# Altium PCB 2017核心板v3.0.PcbDoc (part 1 of 2)
Units mil, origin at the board's own origin, x right, y up, seen from the top; angles counter-clockwise.
Board outline 2660.2 x 2023.11 mil, 2 copper layers (Top Layer, Bottom Layer); 56 components, 128 nets, 399 pads, 43 vias.
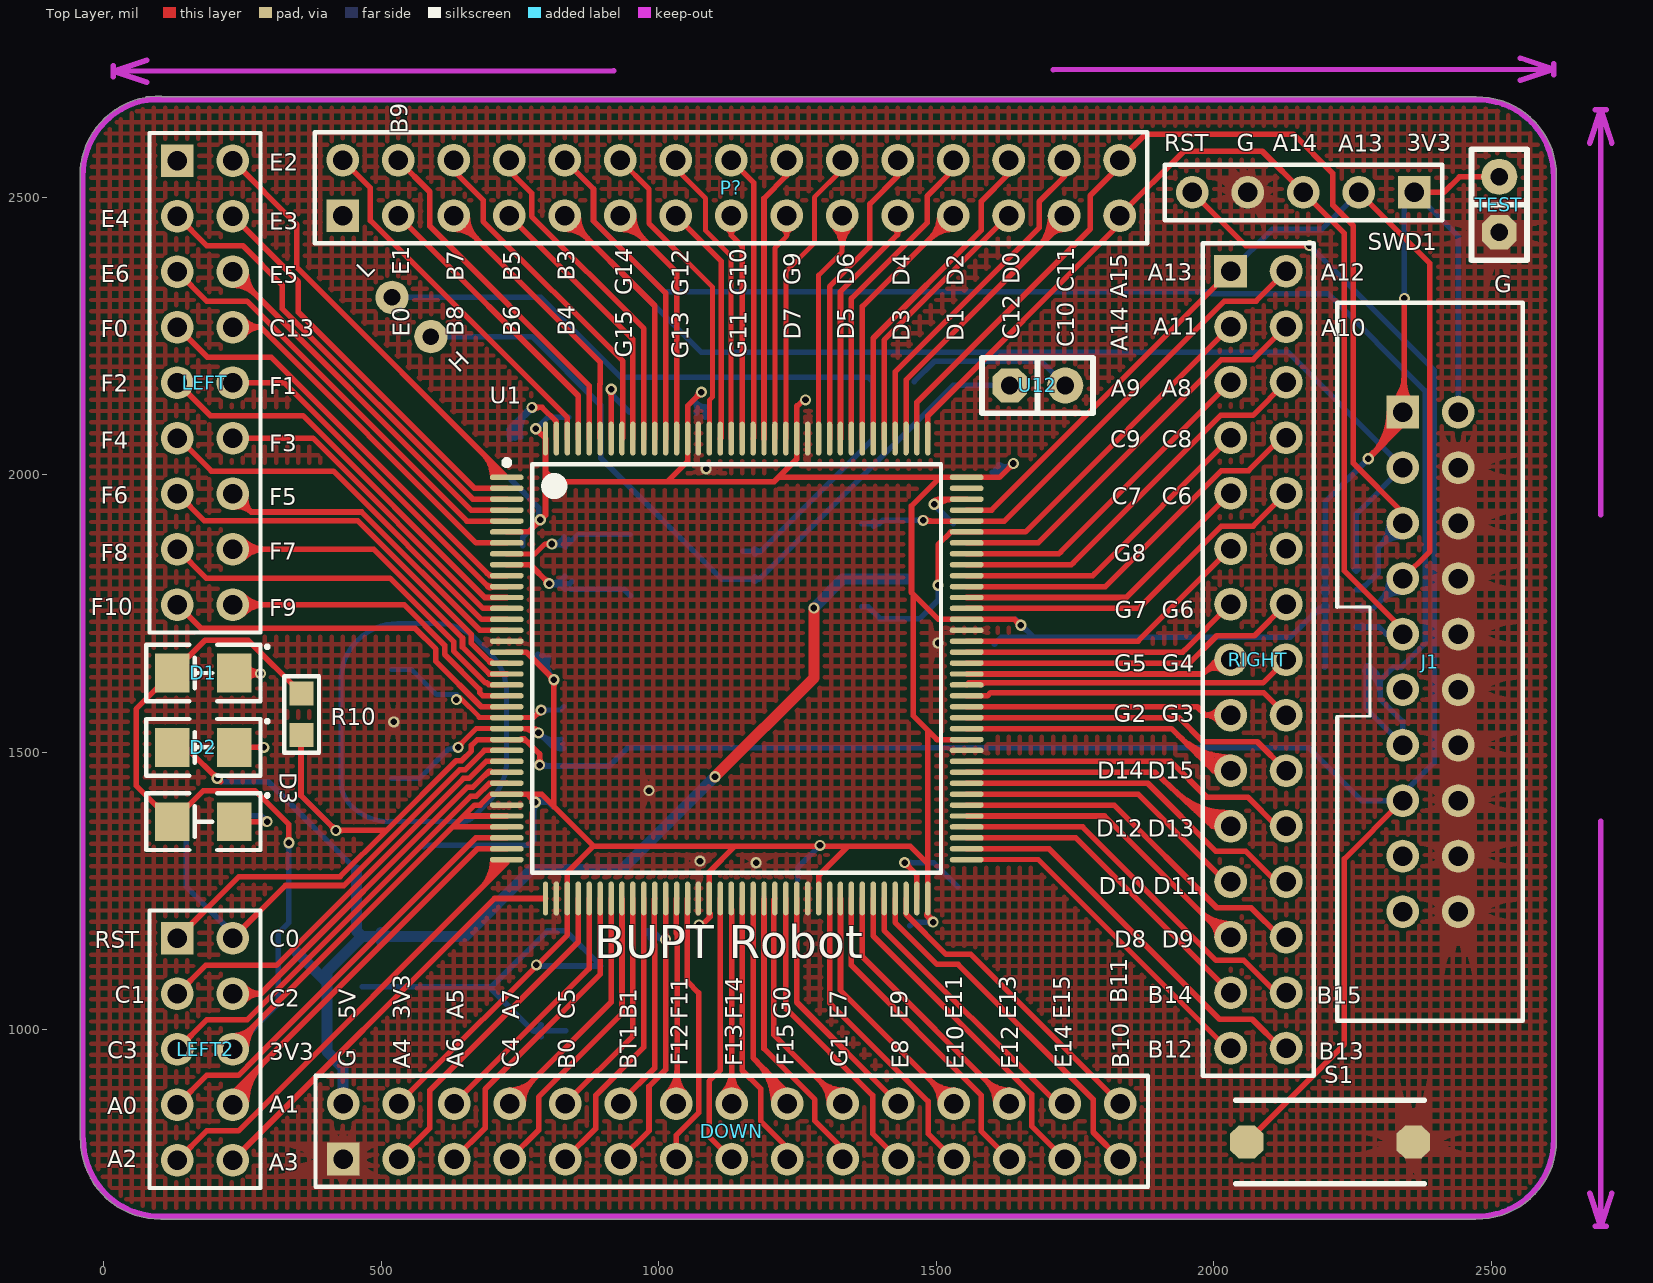
[diagram p0: Top Layer view]
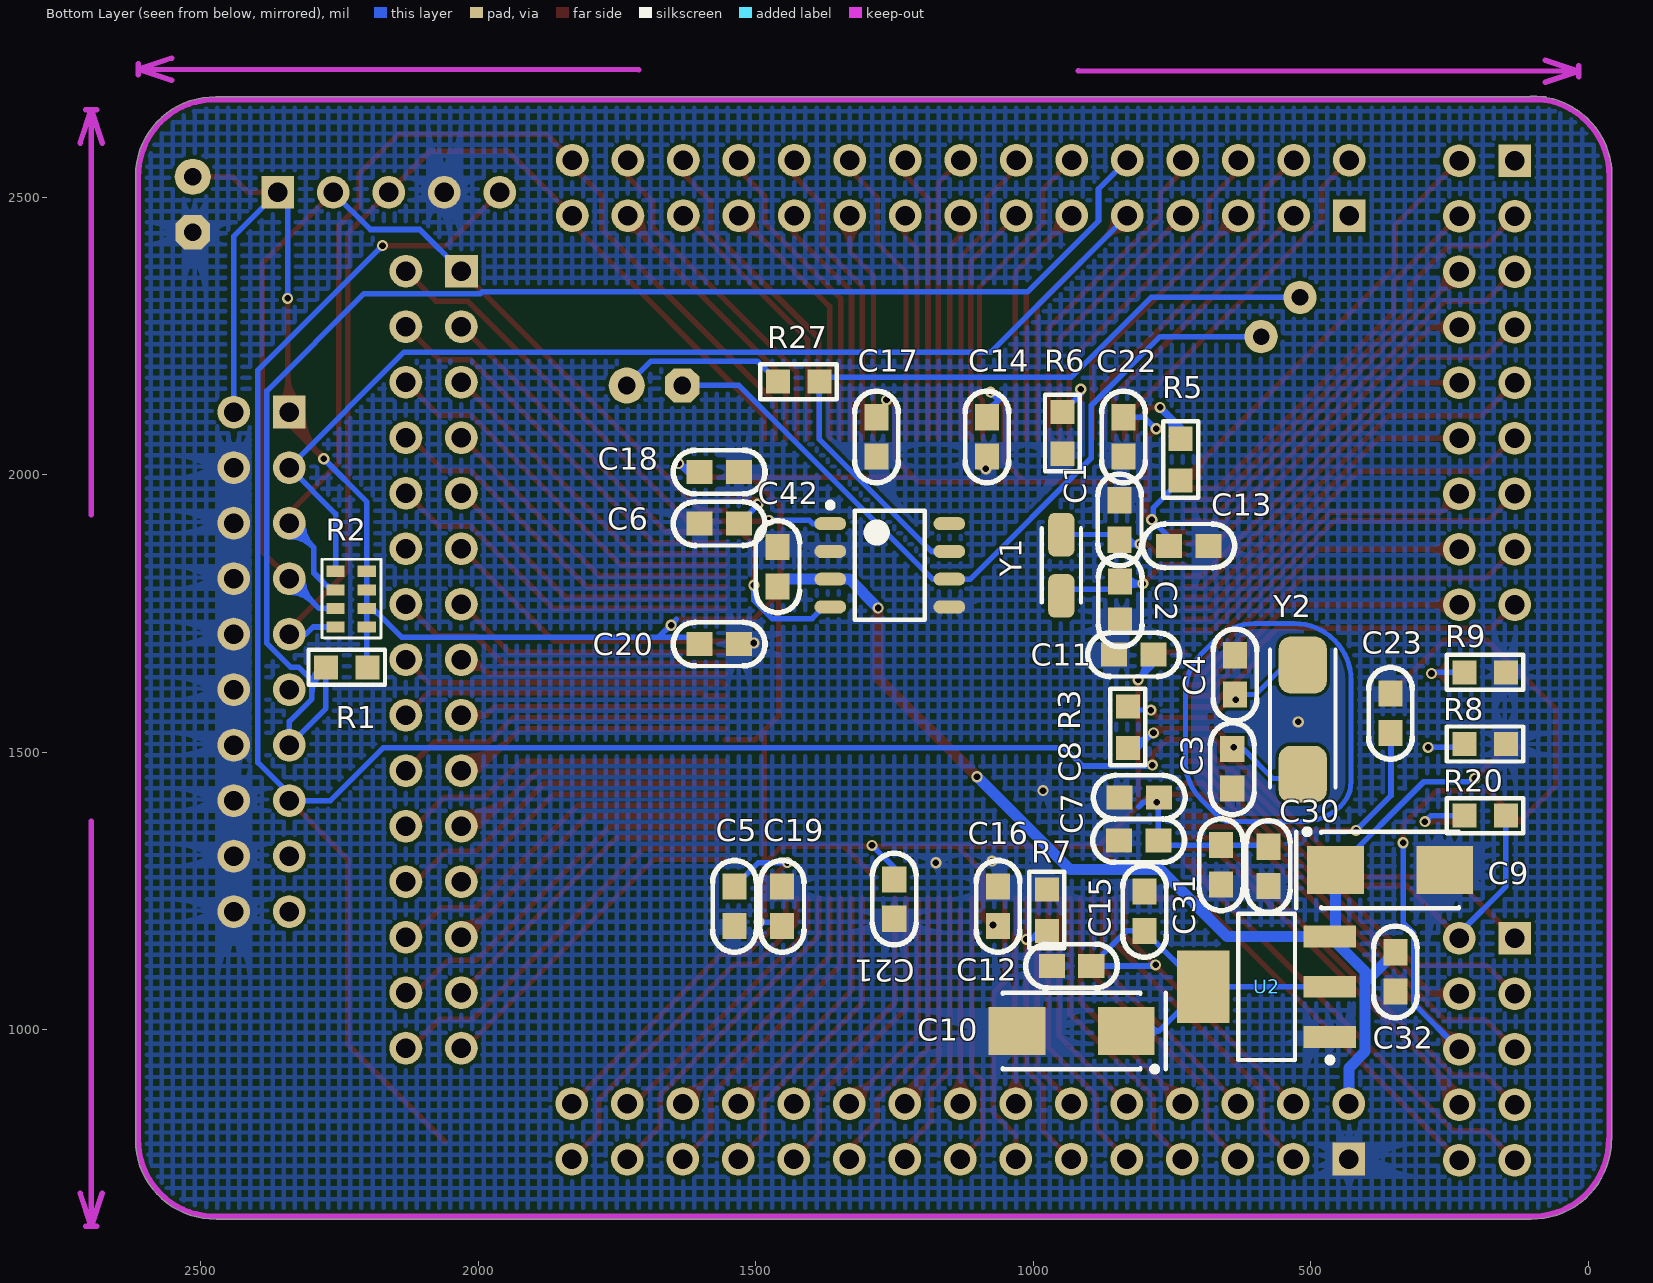
[diagram p1: Bottom Layer view, seen from below]

## Layer stack, top to bottom
Top Layer: signal copper 1.4
Dielectric: dielectric 12.6, FR-4, Dk 4.8
Bottom Layer: signal copper 1.4

## Board outline
-43.01,804 -43.01,2536.6 cw(c-38.08,2537.5) -43.1,2537.43 cw(c99.61,2539.32) 74.8,2679.86 cw(c78,2676) 78,2681.02 82.57,2681.02 cw(c99.61,2539.32) 102.09,2682.01 cw(c102,2677) 105.01,2681.02 2471.6,2681.02 cw(c2472.5,2676.08) 2472.43,2681.1 cw(c2474.32,2538.39) 2617.04,2538.39 cw(c2474.32,2538.39) 2617.02,2535.96 cw(c2474.32,2538.39) 2617.01,2535.91 2617.02,2536 2617.02,804.4 cw(c2612.08,803.5) 2617.1,803.57 cw(c2474.39,801.68) 2617.11,801.68 cw(c2474.39,801.68) 2471.96,658.99 cw(c2474.39,801.68) 2471.91,658.99 2471.96,658.99 103.4,658.99 cw(c102.5,663.92) 102.57,658.9 cw(c100.68,801.61) -42.03,801.02 cw(c-38,804)

## Design rules (kind name [scope] priority, off if disabled: settings)
Clearance [All] p1: gap=5.98
ComponentClearance [All] p1: gap=0.04 collisioncheckmode=3 verticalgap=10 showdistances=FALSE
PolygonConnect [All] p1: connectstyle=Direct reliefconductorwidth=10 reliefentries=4 polygonreliefangle="90 Angle" airgapwidth=10
RoutingVias RoutingVias_1 [All] p1: holewidth=28 width=50 viastyle="Through Hole" minholewidth=10 minwidth=10 maxholewidth=28 maxwidth=50
RoutingVias [All] p2: holewidth=12 width=12 viastyle="Through Hole" minholewidth=10 minwidth=10 maxholewidth=28 maxwidth=50
SolderMaskExpansion [All] p1: expansion=4
Width [All] p1: maxlimit=100 minlimit=7 preferedwidth=10
27 further rules are at their usual default settings.

## Components (designator, comment, footprint, x,y, rotation, side; value= is the part's Value field where it differs from the comment)
C1 "CAP" CAP-MLCC-0603#1 844,1954 r270 bottom
C2 "CAP" CAP-MLCC-0603#1 843,1737 r90 bottom
C3 "CAP" CAP-MLCC-0603#1 641,1435 r90 bottom
C4 "CAP" CAP-MLCC-0603#1 636,1675 r270 bottom
C5 "225" CAP-MLCC-0603#1 1538,1258 r270 bottom
C6 "225" CAP-MLCC-0603#1 1530,1912 r0 bottom
C7 "1uF" CAP-MLCC-0603#1 845,1341 r180 bottom
C8 "0.1uF" CAP-MLCC-0603#1 844,1419 r180 bottom
C9 "CAP-TAN" CAP-TAN-6032/CAPC 455,1288 r0 bottom
C10 "CAP-TAN" CAP-TAN-6032/CAPC 832,998 r180 bottom
C11 "CAP" CAP-MLCC-0603#1 854,1676 r180 bottom
C12 "CAP" CAP-MLCC-0603#1 966,1115 r180 bottom
C13 "CAP" CAP-MLCC-0603#1 684,1872 r0 bottom
C14 "CAP" CAP-MLCC-0603#1 1083,2033 r90 bottom
C15 "CAP" CAP-MLCC-0603#1 799,1249 r270 bottom
C16 "CAP" CAP-MLCC-0603#1 1063,1258 r270 bottom
C17 "CAP" CAP-MLCC-0603#1 1282,2033 r90 bottom
C18 "CAP" CAP-MLCC-0603#1 1530,2005 r0 bottom
C19 "CAP" CAP-MLCC-0603#1 1452,1258 r270 bottom
C20 "CAP" CAP-MLCC-0603#1 1530,1695 r0 bottom
C21 "CAP" CAP-MLCC-0603#1 1250,1200 r90 bottom
C22 "CAP" CAP-MLCC-0603#1 837,2033 r90 bottom
C23 "0.1u" CAP-MLCC-0603#1 356,1605.8 r270 bottom
C30 "1uF" CAP-MLCC-0603#2 576,1259 r270 bottom
C31 "10nF" CAP-MLCC-0603#2 661,1262 r270 bottom
C32 "CAP" CAP-MLCC-0603#2 347,1069 r270 bottom
C42 "0.1μF" CAP-MLCC-0603#2 1460,1799 r270 bottom
D1 "LED" LED-1206 179,1643 r180 top
D2 "LED" LED-1206 179,1509 r180 top
D3 "LED" LED-1206 179,1375 r180 top
DOWN "Header 15X2" HDR2X15 431,767 r0 top
J1 "JTAG" FC_2x10 2340,2113 r0 top
LEFT "Header 9X2" HDR2X9 132,2566 r270 top
LEFT2 "Header 5X2" HDR2X5 132,1165 r270 top
P? "Header 15X2" HDR2X15 430,2467 r0 top
R1 "10K" Res-0603 2274,1653 r180 bottom
R2 "10K" RES-ARR4 2229,1776 r90 bottom
R3 "1MΩ" RES-0603#1 829,1508 r90 bottom
R5 "0Ω" RES-0603#1 734,2065 r270 bottom
R6 "RES" RES-0603#1 947,2038 r90 bottom
R7 "RES" RES-0603#1 975,1253 r270 bottom
R8 "RES" RES-0603#1 222.8,1515 r180 bottom
R9 "RES" RES-0603#1 148,1644 r0 bottom
R10 "RES" RES-0603#1 356,1531 r90 top
R20 "RES" RES-0603#2 148,1386 r180 bottom
R27 "120Ω" RES-0603#2 1385,2168 r180 bottom
RIGHT "Header 15X2" HDR2X15 2030,2367 r270 top
S1 "SW-PB" KEY 2209,798 r0 top
SWD1 "Header 5" HDR1X5 2361,2509 r180 top
TEST "Header 2" SIP2 2514,2537 r270 top
U1 "STM32F407ZGET6" LQFP144-L 1140,1651 r0 top
U2 "IC-AS1117-3.3V" SOT-223 465,987 r90 bottom
U12 "Header 2" SIP2 1732,2161 r180 top
Y1 "32.768kHz" Osc-3216 949,1837 r90 bottom
Y2 "8MHz" Osc-6032 514,1559 r270 bottom
? "TJA1050" TJA1050 1258,1837 r180 bottom

## Footprints (in the part's own frame and the unit in brackets; to place one, negate y for a bottom-side part, rotate by r counter-clockwise, add the part's x,y. Pads: shape width x height; smd on the part's side, far side on the other; paste and mask are expansions set on the pad)
CAP-MLCC-0603#1 [mm]
  rect 1.2x1.1 smd: 1(0,0) 2(1.8,0)
  silkscreen extent -1.2,-1 3,1, body extent 0.02,-0.48 1.77,0.47, height 0.85
CAP-MLCC-0603#2 [mm]
  rect 1.2x1.1 smd: 1(0,0) 2(-1.8,0)
  silkscreen extent -3,-1 1.2,1, body extent -1.77,-0.47 -0.02,0.48, height 0.85
CAP-TAN-6032/CAPC [mm]
  rect 2.6x2.2 smd: 1(0,0) 2(-5,0)
  silkscreen extent -5.65,-1.87 1.8,1.75
FC_2x10 [mm] "Connector; Header; 6x2 Position"
  rect 1.5x1.5 hole 0.9: 1(0,0)
  round 1.5 hole 0.9: 2(2.54,0) 3(0,-2.54) 4(2.54,-2.54) 5(0,-5.08) 6(2.54,-5.08) 7(0,-7.62) 8(2.54,-7.62) 9(0,-10.16) 10(2.54,-10.16) 11(0,-12.7) 12(2.54,-12.7) 13(0,-15.24) 14(2.54,-15.24) 15(0,-17.78) 16(2.54,-17.78) 17(0,-20.32) 18(2.54,-20.32) 19(0,-22.86) 20(2.54,-22.86)
  silkscreen extent -3,-27.86 5.5,5
HDR1X5 [mm] "Connector; Header; 5 Position"
  rect 1.5x1.5 hole 0.9: 1(0,0)
  round 1.5 hole 0.9: 2(2.54,0) 3(5.08,0) 4(7.62,0) 5(10.16,0)
  silkscreen extent -1.27,-1.27 11.43,1.27
HDR2X5 [mm] "Connector; Header; 5x2 Position"
  rect 1.5x1.5 hole 0.9: 1(0,0)
  round 1.5 hole 0.9: 2(0,2.54) 3(2.54,0) 4(2.54,2.54) 5(5.08,0) 6(5.08,2.54) 7(7.62,0) 8(7.62,2.54) 9(10.16,0) 10(10.16,2.54)
  silkscreen extent -1.27,-1.27 11.43,3.81
HDR2X9 [mm] "Connector; Header; 9x2 Position"
  rect 1.5x1.5 hole 0.9: 1(0,0)
  round 1.5 hole 0.9: 2(0,2.54) 3(2.54,0) 4(2.54,2.54) 5(5.08,0) 6(5.08,2.54) 7(7.62,0) 8(7.62,2.54) 9(10.16,0) 10(10.16,2.54) 11(12.7,0) 12(12.7,2.54) 13(15.24,0) 14(15.24,2.54) 15(17.78,0) 16(17.78,2.54) 17(20.32,0) 18(20.32,2.54)
  silkscreen extent -1.27,-1.27 21.59,3.81
HDR2X15 [mm] "Connector; Header; 15x2 Position"
  rect 1.5x1.5 hole 0.9: 1(0,0)
  round 1.5 hole 0.9: 2(0,2.54) 3(2.54,0) 4(2.54,2.54) 5(5.08,0) 6(5.08,2.54) 7(7.62,0) 8(7.62,2.54) 9(10.16,0) 10(10.16,2.54) 11(12.7,0) 12(12.7,2.54) 13(15.24,0) 14(15.24,2.54) 15(17.78,0) 16(17.78,2.54) 17(20.32,0) 18(20.32,2.54) 19(22.86,0) 20(22.86,2.54) 21(25.4,0) 22(25.4,2.54) 23(27.94,0) 24(27.94,2.54) 25(30.48,0) 26(30.48,2.54) 27(33.02,0) 28(33.02,2.54) 29(35.56,0) 30(35.56,2.54)
  silkscreen extent -1.27,-1.27 36.83,3.81
KEY [mil]
  oct 60x60 smd: 1(-150,0) 2(150,0)
  silkscreen extent -170,-75 170,75
LED-1206 [mil]
  rect 62x70 smd: 1(56,0) 2(-56,0)
  silkscreen extent -116,-51 103,51
LQFP144-L [mm]
  oval 1.55x0.25 smd: 1(-10.525,8.75) 2(-10.525,8.25) 3(-10.525,7.75) 4(-10.525,7.25) 5(-10.525,6.75) 6(-10.525,6.25) 7(-10.525,5.75) 8(-10.525,5.25) 9(-10.525,4.75) 10(-10.525,4.25) 11(-10.525,3.75) 12(-10.525,3.25) 13(-10.525,2.75) 14(-10.525,2.25) 15(-10.525,1.75) 16(-10.525,1.25) 17(-10.525,0.75) 18(-10.525,0.25) 19(-10.525,-0.25) 20(-10.525,-0.75) 21(-10.525,-1.25) 22(-10.525,-1.75) 23(-10.525,-2.25) 24(-10.525,-2.75) 25(-10.525,-3.25) 26(-10.525,-3.75) 27(-10.525,-4.25) 28(-10.525,-4.75) 29(-10.525,-5.25) 30(-10.525,-5.75) 31(-10.525,-6.25) 32(-10.525,-6.75) 33(-10.525,-7.25) 34(-10.525,-7.75) 35(-10.525,-8.25) 36(-10.525,-8.75) 73(10.525,-8.75) 74(10.525,-8.25) 75(10.525,-7.75) 76(10.525,-7.25) 77(10.525,-6.75) 78(10.525,-6.25) 79(10.525,-5.75) 80(10.525,-5.25) 81(10.525,-4.75) 82(10.525,-4.25) 83(10.525,-3.75) 84(10.525,-3.25) 85(10.525,-2.75) 86(10.525,-2.25) 87(10.525,-1.75) 88(10.525,-1.25) 89(10.525,-0.75) 90(10.525,-0.25) 91(10.525,0.25) 92(10.525,0.75) 93(10.525,1.25) 94(10.525,1.75) 95(10.525,2.25) 96(10.525,2.75) 97(10.525,3.25) 98(10.525,3.75) 99(10.525,4.25) 100(10.525,4.75) 101(10.525,5.25) 102(10.525,5.75) 103(10.525,6.25) 104(10.525,6.75) 105(10.525,7.25) 106(10.525,7.75) 107(10.525,8.25) 108(10.525,8.75)
  oval 0.25x1.55 smd: 37(-8.75,-10.525) 38(-8.25,-10.525) 39(-7.75,-10.525) 40(-7.25,-10.525) 41(-6.75,-10.525) 42(-6.25,-10.525) 43(-5.75,-10.525) 44(-5.25,-10.525) 45(-4.75,-10.525) 46(-4.25,-10.525) 47(-3.75,-10.525) 48(-3.25,-10.525) 49(-2.75,-10.525) 50(-2.25,-10.525) 51(-1.75,-10.525) 52(-1.25,-10.525) 53(-0.75,-10.525) 54(-0.25,-10.525) 55(0.25,-10.525) 56(0.75,-10.525) 57(1.25,-10.525) 58(1.75,-10.525) 59(2.25,-10.525) 60(2.75,-10.525) 61(3.25,-10.525) 62(3.75,-10.525) 63(4.25,-10.525) 64(4.75,-10.525) 65(5.25,-10.525) 66(5.75,-10.525) 67(6.25,-10.525) 68(6.75,-10.525) 69(7.25,-10.525) 70(7.75,-10.525) 71(8.25,-10.525) 72(8.75,-10.525) 109(8.75,10.525) 110(8.25,10.525) 111(7.75,10.525) 112(7.25,10.525) 113(6.75,10.525) 114(6.25,10.525) 115(5.75,10.525) 116(5.25,10.525) 117(4.75,10.525) 118(4.25,10.525) 119(3.75,10.525) 120(3.25,10.525) 121(2.75,10.525) 122(2.25,10.525) 123(1.75,10.525) 124(1.25,10.525) 125(0.75,10.525) 126(0.25,10.525) 127(-0.25,10.525) 128(-0.75,10.525) 129(-1.25,10.525) 130(-1.75,10.525) 131(-2.25,10.525) 132(-2.75,10.525) 133(-3.25,10.525) 134(-3.75,10.525) 135(-4.25,10.525) 136(-4.75,10.525) 137(-5.25,10.525) 138(-5.75,10.525) 139(-6.25,10.525) 140(-6.75,10.525) 141(-7.25,10.525) 142(-7.75,10.525) 143(-8.25,10.525) 144(-8.75,10.525)
  silkscreen extent -10.65,-9.35 9.35,9.55
Osc-3216 [mm]
  rrect50% 2x1.2 smd: 1(-1.4,0) 2(1.4,0)
  silkscreen extent -1.7,-0.9 1.7,0.9
Osc-6032 [mm]
  rrect50% 2.6x2.2 smd: 1(-2.5,0) 2(2.5,0)
  silkscreen extent -3.2,-1.5 3.1,1.5
Res-0603 [mm]
  rect 1.1x1.1 smd: 1(0,0) 2(1.9,0)
  silkscreen extent -0.8,-0.8 2.7,0.8, body extent 0.1,-0.48 1.8,0.47, height 0.6
RES-0603#1 [mm]
  rect 1.1x1.1 smd: 1(0,0) 2(1.9,0)
  silkscreen extent -0.8,-0.8 2.7,0.8, body extent 0.1,-0.48 1.8,0.47, height 0.6
RES-0603#2 [mm]
  rect 1.1x1.1 smd: 1(0,0) 2(-1.9,0)
  silkscreen extent -2.7,-0.8 0.8,0.8, body extent -1.8,-0.47 -0.1,0.48, height 0.6
RES-ARR4 [mm]
  rect 0.508x0.835 smd: 1(-1.275,0.701) 2(-1.275,-0.727) 3(-0.425,0.701) 4(-0.425,-0.727) 5(0.425,0.701) 6(0.425,-0.727) 7(1.275,0.701) 8(1.275,-0.727)
  silkscreen extent -1.77,-1.37 1.83,1.32
SIP2 [mil]
  round 65 hole 32: 1(0,0)
  oct 62x62 hole 32: 2(100,0)
  silkscreen extent -50,-50 150,50
SOT-223 [mm] "SOT223, 4-Leads, Body 6.7x7.3mm (max), Pitch 2.30mm, IPC Medium Density"
  rect 1x2.4 smd: 1(0,0) 2(2.3,0) 3(4.6,0)
  rect 3.3x2.4 smd: 2(2.3,5.8)
  silkscreen extent -1.17,-0.12 5.65,4.2
TJA1050 [mm] "SOIC, 8-Leads, Body 4.90x3.90mm, Pitch 1.27mm, IPC Medium Density"
  oval 1.45x0.6 smd: 1(-2.725,1.905) 2(-2.725,0.635) 3(-2.725,-0.635) 4(-2.725,-1.905) 5(2.725,-1.905) 6(2.725,-0.635) 7(2.725,0.635) 8(2.725,1.905)
  silkscreen extent -2.85,-2.5 1.6,2.88, body extent -2,-2.5 2,2.5, height 1.75

## Part data
C1 C2 C3 C4 C11 C12 C13 C14 C15 C16 C17 C18 C19 C20 C21 C22 C32: "无极性电容"
C5 C6 C7 C8 C23 C30 C31 C42: library part CAP, "无极性电容"
C9 C10: "钽电容"
DOWN P? RIGHT: "Header, 15-Pin, Dual row"
LEFT: "Header, 9-Pin, Dual row"
LEFT2: "Header, 5-Pin, Dual row"
R1: library part Res1, "Resistor"
R2: library part RES-ARR4
R3 R5 R27: library part RES, "电阻"
R6 R7 R8 R9 R10 R20: "电阻"
S1: "Switch"
SWD1: "Header, 5-Pin"
TEST U12: "Header, 2-Pin"
U1: library part Component_1
U2: "AS1117-3.3V"
Y1 Y2: library part C-Osc, "Crystal Oscillator"
?: "CAN总线收发器"

## Free pads (board coordinates)
  round 60 hole 30: 0(519,2319.71) 1(589,2249)

## Via types
v1: diameter 20, hole 12, Top Layer to Bottom Layer, 43 vias

## Nets (pads, with @x,y where several pads share a name; then routed paths per layer and width w, separated by ;. In a path a pad name is that pad's centre, name@x,y a point inside that pad or via, vN(x,y) a via of type N, cw(c..) or ccw(c..) an arc to the next point about the centre after c; other vN are vias at no path point)
3V3: C7.2 C8.2 C10.1 C11.2 C12.2 C13.2 C14.2 C15.2 C16.2 C17.2 C18.2 C19.2 C20.2 C21.2 C22.2 C30.2 C31.2 D1.1 D3.1 DOWN.4 J1.1 J1.2 LEFT2.6 R1.2 R2.2 R2.4 R2.6 R2.8 R5.2 R10.2 SWD1.1 TEST.1 U1.6 U1.17 U1.30 U1.32 U1.33 U1.39 U1.52 U1.62 U1.72 U1.84 U1.95 U1.108 U1.121 U1.131 U1.144 U2.2 | length 12153.7
  Top Layer w10: LEFT2.6@232,965 232,969.39 647.86,1385.25 ; LEFT2.6@232,989.53 ccw(c232,1038.13) 266.37,1003.76 ; LEFT2.6@246.53,965 cw(c292.21,965) 259.91,997.3 ; LEFT2.6@256.53,965 cw(c326.35,965) 276.98,1014.37 ; v1@329.46,1340.54 ccw(c320.93,1349.07) 333,1349.07 ccw(c345.07,1349.07) v1@336.54,1340.54 ; v1(333,1337) 333,1370 271.98,1431.02 179.02,1431.02 D3.1@123,1375 58,1440 58,1578 D1.1@123,1643 182,1702 259.8,1702 R10.2@356,1605.8 ; DOWN.4@531,867 834.88,1170.88 U1.39@834.88,1236.63 834.88,1283.88 882,1331 ; 629.43,1365.57 U1.33@725.63,1365.57 ; 695.38,1422.77 cw(c700.04,1418.11) U1.30@700.04,1424.7 ; U1.32@725.63,1385.25 647.86,1385.25 ; U1.17@725.63,1680.53 760.89,1680.53 v1(810.63,1630.78) 810.63,1402.37 ; U1.6@725.63,1897.06 765.06,1897.06 795.51,1927.51 ; v1@772,1410 ccw(c759.93,1410) 768.46,1418.54 ccw(c777,1427.07) v1@777,1415 ; 776.76,1908.76 ccw(c766.51,1919) v1@781,1919 ; v1(777,1410) 762.38,1424.62 ; v1@777.88,2078 cw(c777.88,2065.93) 786.42,2074.46 cw(c794.95,2083) v1@782.88,2083 ; v1(777.88,2083) U1.144@795.51,2065.37 795.51,2006 ; 779.17,1911.17 cw(c786,1904.34) v1@786,1914 ; v1@786.28,1923.99 ccw(c786.97,1936.05) 795.51,1927.51 ; v1@791,1919 cw(c800.66,1919) 793.83,1925.83 ; v1@805.63,1630.78 ccw(c793.56,1630.78) 802.1,1639.32 ccw(c810.63,1647.85) v1@810.63,1635.78 ; v1@807.1,1627.25 cw(c798.56,1618.71) 810.63,1618.71 cw(c822.7,1618.71) v1@814.17,1627.25 ; v1@1071.3,2149 cw(c1059.23,2149) 1067.77,2140.46 cw(c1076.3,2131.93) v1@1076.3,2144 ; v1(1072,1189) 1077.61,1189 1090.79,1202.18 ; v1(1076.3,2149) 1051.42,2124.11 U1.131@1051.42,2065.37 1051.42,2023.91 1015.17,1987.66 ; U1.52@1090.84,1211.09 cw(c1086.3,1206.67) 1090.79,1202.18 ; 1218.51,1995.49 1506.49,1995.49 ; v1(1264.04,2135) 1260.54,2135 1249.52,2123.98 1248.27,2123.98 U1.121@1248.27,2065.37 1248.27,2028.27 1207.66,1987.66 1015.17,1987.66 ; U1.62@1287.64,1236.63 1287.64,1277.64 1341,1331 ; U1.72@1482.09,1207.67 ccw(c1497.6,1216.63) v1@1494.79,1198.94 ; 1483.48,1205.25 ccw(c1494.32,1211.51) v1@1494.09,1199 ; U1.72@1484.41,1211.04 ccw(c1502.39,1211.04) v1@1489.68,1198.32 ; U1.72@1484.43,1211.09 ccw(c1488.31,1207.33) 1484.49,1203.51 ; U1.72@1484.68,1206.97 ccw(c1499.82,1215.71) v1@1495.29,1198.83 ; v1@1489,1194 ccw(c1476.93,1194) 1485.46,1202.54 ccw(c1494,1211.07) v1@1494,1199 ; v1(1494,1194) 1484.49,1203.51 ; U1.84@1554.37,1523.05 1500.95,1523.05 1484.49,1539.51 ; v1@1633.5,2020.5 cw(c1621.43,2020.5) 1629.96,2011.96 cw(c1638.5,2003.43) v1@1638.5,2015.5 ; v1(1638.5,2020.5) 1613.49,1995.49 U1.108@1554.37,1995.49 1506.49,1995.49 ; 1642.63,1737.88 ccw(c1652,1747.25) v1@1652,1734 ; 1643.81,1736.7 cw(c1636.11,1729) v1@1647,1729 ; v1@1647,1729.17 ccw(c1637.33,1729.49) 1644.17,1736.34 ; v1@1651.3,1733.95 cw(c1650.13,1742.3) 1644.17,1736.34 ; v1@2277.17,2033.93 ccw(c2274.54,2049.46) 2287.38,2040.33 ; v1(2278,2029) 2340,2091 J1.1@2340,2113 2343,2116 v1(2343,2318) ; v1@2278,2034 ccw(c2278,2046.07) 2286.54,2037.54 ccw(c2295.07,2029) v1@2283,2029 ; v1@2282.57,2033.57 ccw(c2203.15,2113) J1.1@2315.47,2113 ; 2299.64,2050.64 ccw(c2237.29,2113) J1.1@2325.47,2113 ; 2316.71,2067.71 ccw(c2271.43,2113) J1.1@2335.47,2113 ; J1.1@2322.66,2130.34 ccw(c2273.54,2179.46) 2343,2179.46 ; J1.1@2329.73,2123.27 ccw(c2297.68,2155.32) 2343,2155.32 ; v1@2339.46,2314.46 cw(c2330.93,2305.93) 2343,2305.93 cw(c2355.07,2305.93) v1@2346.54,2314.46 ; 2343,2164.97 ccw(c2391.97,2164.97) J1.1@2357.34,2130.34 ; SWD1.1@2361,2509 2414,2509 2442,2537 TEST.1@2514,2537 ; 647.86,1385.25 667.57,1404.96 677.57,1404.96 697.23,1424.62 U1.30@725.63,1424.62 762.38,1424.62 ; 762.38,1424.62 788.38,1424.62 810.63,1402.37 ; 795.51,1927.51 795.51,2006 ; 795.51,2006 813.85,1987.66 1015.17,1987.66 ; 810.63,1402.37 882,1331 ; 882,1331 1137,1331 ; 1090.79,1202.18 U1.52@1090.79,1236.63 1090.79,1284.79 1137,1331 ; 1137,1331 1341,1331 ; 1341,1331 1452.49,1331 1484.49,1299 ; 1458,1785 1455.02,1787.98 1455.02,1944.02 1506.49,1995.49 ; 1458,1785 1503.42,1739.58 U1.95@1554.37,1739.58 1640.93,1739.58 1644.17,1736.34 ; 1458,1785 1458,1566 1484.49,1539.51 ; 1484.49,1203.51 U1.72@1484.49,1236.63 1484.49,1299 ; 1484.49,1299 1484.49,1539.51
  Bottom Layer w10: LEFT2.6@232,965 314.36,1047.36 314.36,1174.47 333,1193.11 v1(333,1337) ; v1@329.46,1333.46 cw(c320.93,1324.93) 333,1324.93 cw(c345.07,1324.93) v1@336.54,1333.46 ; U2.2@465,1077.55 U2.2@693.35,1077.55 ; C30.2@576,1329.87 579,1332.87 C31.2@661,1332.87 766,1332.87 C7.2@774.13,1341 774.13,1418 C8.2@773.13,1419 C8.2@783.19,1419 ; R5.2@734,1990.2 783.2,1941 783.2,1921.8 v1(786,1919) 754.87,1887.87 C13.2@754.87,1872 ; 774.13,1391.01 cw(c795.99,1391.01) 780.54,1406.46 cw(c789.07,1397.93) 789.07,1410 cw(c789.07,1422.07) C8.2@780.54,1413.54 ; v1(777,1410) 801.34,1410 ; v1(777.88,2083) 779,2083 799.87,2103.87 C22.2@837,2103.87 ; v1@777.88,2088 ccw(c777.88,2102.77) 788.33,2092.33 ; v1(779,1117) 781,1115 C12.2@895.13,1115 832,1178.13 C15.2@799,1178.13 698.42,1077.55 U2.2@693.35,1077.55 ; v1@781,1919 cw(c768.93,1919) 777.46,1910.46 cw(c786,1901.93) v1@786,1914 ; C11.2@781.92,1677.03 ccw(c803.61,1670.04) 787.49,1653.92 ; v1@782.54,1120.54 ccw(c795.9,1133.9) 795.9,1115 ; v1@782.88,2083 cw(c792.25,2083) 785.63,2089.63 ; C11.2@783.13,1676 783.13,1658.28 v1(810.63,1630.78) cw(c838.61,1658.76) C11.2@800.95,1670.89 ; C10.1@787.38,987.17 ccw(c772.9,982.9) 772.9,998 ; C10.1@787.38,1008.83 cw(c772.9,1013.1) 772.9,998 ; C11.2@791.44,1673.96 ccw(c821.11,1664.4) 799.06,1642.35 ; C8.2@791.75,1419.37 ccw(c801.34,1419.59) 801.34,1410 ; v1@805.63,1630.78 ccw(c793.56,1630.78) 802.1,1639.32 ccw(c810.63,1647.85) v1@810.63,1635.78 ; 809.39,1401.94 801.34,1410 ; C10.1@832,998 772.9,998 ; C14.2@1067.32,2111.43 ccw(c1046.26,2118.95) 1062.07,2134.76 ; 1068.23,2128.61 ccw(c1083,2143.38) C14.2@1083,2122.49 ; v1@1071.3,2149 cw(c1059.23,2149) 1067.77,2140.46 cw(c1076.3,2131.93) v1@1076.3,2144 ; v1(1076.3,2149) 1062.07,2134.77 ; C14.2@1083,2103.87 1083,2113.83 1062.07,2134.77 ; C21.2@1250,1270.87 1250,1292.47 v1(1290,1332.47) ; v1@1260.54,2135 v1(1264.04,2135) ; v1@1285,1332.47 cw(c1272.93,1332.47) 1281.46,1323.94 cw(c1290,1315.4) v1@1290,1327.47 ; C19.2@1452,1187.13 1458.87,1194 v1(1494,1194) ; v1@1490.46,1190.46 ccw(c1481.93,1181.93) 1481.93,1194 ccw(c1481.93,1206.07) v1@1490.46,1197.54 ; C18.2@1600.87,2005 1623,2005 v1(1638.5,2020.5) cw(c1624.38,2034.62) C18.2@1612.63,2018.47 ; C20.2@1604.57,1695 1617.08,1707.51 1675,1707.51 ; C18.2@1606.75,2010.38 ccw(c1617.41,2025.04) 1630.22,2012.22 ; C18.2@1623.23,2008.18 ccw(c1612.02,2027.6) v1@1633.67,2021.79 ; v1@1633.5,2020.5 cw(c1621.43,2020.5) 1629.96,2011.96 cw(c1638.5,2003.43) v1@1638.5,2015.5 ; v1@1647,1729.19 ccw(c1633.07,1729.72) 1642.93,1739.58 1675,1707.51 ; v1@1652,1724 cw(c1652,1708.28) 1663.12,1719.4 ; 2177.42,1747.42 cw(c2193.96,1730.88) R2.4@2193.96,1754.27 ; R2.2@2196.86,1722.27 cw(c2188.32,1713.73) 2200.39,1713.73 cw(c2212.46,1713.73) R2.2@2203.93,1722.27 ; R2.2@2196.86,1729.34 ccw(c2188.32,1737.87) 2200.39,1737.87 ccw(c2212.46,1737.87) R2.2@2203.93,1729.34 ; R2.4@2196.86,1755.73 cw(c2188.32,1747.2) 2200.39,1747.2 cw(c2212.46,1747.2) R2.4@2203.93,1755.73 ; R2.4@2196.86,1762.8 ccw(c2188.32,1771.34) 2200.39,1771.34 ccw(c2212.46,1771.34) R2.4@2203.93,1762.8 ; R2.6@2196.86,1789.2 cw(c2188.32,1780.66) 2200.39,1780.66 cw(c2212.46,1780.66) R2.6@2203.93,1789.2 ; R2.6@2196.86,1796.27 ccw(c2188.32,1804.8) 2200.39,1804.8 ccw(c2212.46,1804.8) R2.6@2203.93,1796.27 ; R2.8@2196.86,1822.66 cw(c2188.32,1814.13) 2200.39,1814.13 cw(c2212.46,1814.13) R2.8@2203.93,1822.66 ; R2.8@2196.86,1829.73 ccw(c2188.32,1838.27) 2200.39,1838.27 ccw(c2212.46,1838.27) R2.8@2203.93,1829.73 ; R1.2@2199.2,1653 2200.39,1654.2 R2.2@2200.39,1725.8 R2.4@2200.39,1759.27 ; v1@2273,2029 cw(c2260.93,2029) 2269.46,2020.46 cw(c2278,2011.93) v1@2278,2024 ; v1(2278,2029) 2200.39,1951.39 R2.8@2200.39,1826.2 R2.6@2200.39,1792.73 R2.4@2200.39,1759.27 ; v1@2339.46,2321.54 ccw(c2330.93,2330.07) 2343,2330.07 ccw(c2355.07,2330.07) v1@2346.54,2321.54 ; v1(2343,2318) 2343,2491 SWD1.1@2361,2509 2440,2430 J1.2@2440,2113 ; U2.2@693.35,1077.55 772.9,998 ; 1675,1707.51 2137.51,1707.51 2189.27,1759.27 R2.4@2200.39,1759.27
  other v1: 1652,1729
5V: ?.3 C9.1 C32.2 C42.1 D2.1 DOWN.2 U2.3 | length 2351.1
  Top Layer w10: D2.1@123,1509 148,1509 v1@210,1447 ; v1@199,1453 ccw(c186.93,1453) 195.46,1461.54 ccw(c204,1470.07) v1@204,1458
  Top Layer w20: v1(1101,1456) 1279,1634 v1(1279,1760)
  Bottom Layer w10: v1(204,1453) 210,1447 296,1447 C9.1@455,1288
  Bottom Layer w20: C32.2@347,1139.87 401.77,1085.09 ; DOWN.2@431,867 431,931.47 401.77,960.69 401.77,1085.09 ; C9.1@455,1288 455,1178.1 U2.3@465,1168.1 ; U2.3@499.41,1161.25 cw(c515.94,1144.72) 515.94,1168.1 cw(c515.94,1191.48) U2.3@499.41,1174.95 ; v1(1101,1456) 933.61,1288.61 770.73,1288.61 650.22,1168.1 U2.3@465,1168.1 ; v1(1279,1760) 1331,1812 ?.3@1365.28,1812 C42.1@1447,1812 ; 401.77,1085.09 401.77,1104.87 U2.3@465,1168.1
BOOT0: R6.2 U1.138 | length 162.9
  Top Layer w10: v1@910.46,2150.61 cw(c902.84,2142.98) 913.62,2142.98 ; U1.138@913.62,2065.37 913.62,2153.76 v1(914,2154.14) ; 913.62,2141.16 cw(c926.98,2141.16) v1@917.54,2150.61
  Bottom Layer w10: v1(914,2154.14) 914,2145.8 R6.2@947,2112.8
BOOT1: DOWN.11 R7.2 U1.48 | length 642.4
  Top Layer w10: DOWN.11@931,767 982,818 982,898 1012.05,928.05 U1.48@1012.05,1236.63 ; v1@1008.51,1159.46 cw(c999.98,1150.93) 1012.05,1150.93 cw(c1024.12,1150.93) v1@1015.58,1159.46 ; v1@1008.51,1166.54 ccw(c999.98,1175.07) 1012.05,1175.07 ccw(c1024.12,1175.07) v1@1015.58,1166.54
  Bottom Layer w10: R7.2@975,1178.2 988.8,1178.2 v1@1004,1163 ; R7.2@978.86,1172.77 cw(c986.41,1162.14) R7.2@995.63,1171.37 ; R7.2@984.65,1164.62 cw(c993.36,1152.37) v1@1004,1163 ; 999.27,1165.73 ccw(c1003.31,1172.73) v1@1008.7,1166.72 ; v1(1012.05,1163) 1012.05,1168.95 1006.09,1163 v1@1004,1163
CANH: ?.6 pad.1 U12.2 | length 1443
  Bottom Layer w10: pad.1@589,2249 771,2249 895,2125 895,2030 1113,1812 ?.6@1150.72,1812 1181,1812 ; ?.6@1172.91,1807.94 cw(c1181,1801.93) 1181,1812 ; ?.6@1172.91,1816.06 ccw(c1181,1822.07) 1181,1812 ; U12.2@1632,2161 1530,2161 1181,1812
CANL: ?.7 pad.0 R27.1 | length 1375.2
  Bottom Layer w10: pad.0@518.29,2319.71 787.29,2319.71 931,2176 1377,2176 R27.1@1385,2168 1385,2064 1183,1862 ; ?.7@1150.72,1862 1183,1862 ; ?.7@1172.45,1857.38 cw(c1183,1847.65) 1183,1862 ; ?.7@1172.45,1866.62 ccw(c1183,1876.35) 1183,1862
GND: ?.2 ?.5 C1.1 C2.1 C3.1 C4.1 C5.2 C6.2 C7.1 C8.1 C9.2 C10.2 C11.1 C12.1 C13.1 C14.1 C15.1 C16.1 C17.1 C18.1 C19.1 C20.1 C21.1 C22.1 C23.1 C30.1 C31.1 C32.1 C42.2 DOWN.1 J1.4 J1.6 J1.8 J1.10 J1.12 J1.14 J1.16 J1.18 J1.20 R6.1 R7.1 R8.2 R9.1 S1.2 SWD1.4 TEST.2 U1.16 U1.31 U1.38 U1.51 U1.61 U1.83 U1.94 U1.120 U1.130 U2.1
  other v1: 1175,1301 1074,1304 982,1431 522,1555 1503,1697 1085,2011
NetC5_1: C5.1 U1.71 | length 225
  Top Layer w10: v1@1442.69,1296.31 cw(c1442.69,1284.24) 1451.23,1292.77 cw(c1459.76,1301.31) v1@1447.69,1301.31 ; v1(1442.69,1301.31) 1464.8,1279.2 U1.71@1464.8,1236.63
  Bottom Layer w10: v1(1442.69,1301.31) 1494.69,1301.31 C5.1@1538,1258 ; v1@1446.23,1297.77 cw(c1454.76,1289.24) 1454.76,1301.31 cw(c1454.76,1313.38) v1@1446.23,1304.84
NetC6_1: C6.1 U1.106 | length 198.1
  Top Layer w10: v1@1492.46,1950.54 cw(c1505.94,1937.06) 1505.94,1956.12 ; v1(1496,1947) 1505.12,1956.12 U1.106@1554.37,1956.12 ; v1@1496,1952 ccw(c1496,1964.07) 1504.54,1955.54 ccw(c1513.07,1947) v1@1501,1947 ; v1@1499.54,1943.46 cw(c1530.08,1912.92) U1.106@1530.08,1956.12
  Bottom Layer w10: v1@1496,1942 cw(c1496,1932.34) 1502.83,1939.17 ; v1(1496,1947) 1496,1946 C6.1@1530,1912 ; v1@1501,1947 ccw(c1515.49,1947) 1505.24,1936.76
NetD1_2: D1.2 R9.2 | length 200.8
  Top Layer w10: D1.2@235,1643 v1@282,1643 ; D1.2@257.03,1629.19 cw(c282,1613.52) v1@282,1643 ; D1.2@257.03,1656.81 ccw(c282,1672.48) v1@282,1643 ; 267.51,1643 cw(c267.51,1627.51) v1@278.46,1638.46 ; 268.34,1646.66 cw(c264.36,1631.82) v1@277.67,1639.5 ; 268.88,1639.48 cw(c272.21,1627.06) v1@279.26,1637.82
  Bottom Layer w10: R9.2@222.8,1644 v1@282,1644
  other v1: 282,1642
NetD2_2: D2.2 R8.1 | length 158.6
  Top Layer w10: D2.2@235,1509 v1(288,1509) ; v1@284.46,1505.46 ccw(c275.93,1496.93) 275.93,1509 ccw(c275.93,1521.07) v1@284.46,1512.54
  Bottom Layer w10: R8.1@222.8,1515 228.8,1509 v1(288,1509) ; v1@284.46,1505.46 ccw(c275.93,1496.93) 275.93,1509 ccw(c275.93,1521.07) v1@284.46,1512.54
NetD3_2: D3.2 R20.2 | length 172.7
  Top Layer w10: D3.2@235,1375 v1(294,1375) ; v1@290.46,1371.46 ccw(c281.93,1362.93) 281.93,1375 ccw(c281.93,1387.07) v1@290.46,1378.54
  Bottom Layer w10: R20.2@222.8,1386 283,1386 v1(294,1375) ; v1@289,1375 ccw(c276.93,1375) 285.46,1383.54 ccw(c294,1392.07) v1@294,1380
NetR5_1: R5.1 U1.143 | length 369.7
  Top Layer w10: v1(771,2121.5) 789.47,2121.5 815.2,2095.78 U1.143@815.2,2065.37 ; v1@774.54,2117.96 cw(c783.07,2109.43) 783.07,2121.5 cw(c783.07,2133.57) v1@774.54,2125.04 ; 811.93,2099.05 cw(c803.84,2090.96) U1.143@815.28,2090.96
  Bottom Layer w10: R5.1@729.33,2080.98 ccw(c727.51,2087.22) 734,2087.22 ; R5.1@730.69,2064.5 cw(c764.16,2069.51) 740.23,2093.45 ; R5.1@734,2065 734,2087.22 ; R5.1@738.67,2080.98 cw(c740.49,2087.22) 734,2087.22 ; R5.1@740.58,2065.98 cw(c788.56,2073.17) 754.26,2107.47 ; R5.1@750.47,2067.47 cw(c812.96,2076.82) v1@768.28,2121.5 ; 757.83,2111.04 cw(c771,2097.87) v1@771,2116.5 ; 760.08,2107.3 cw(c777.5,2097.25) v1@772.29,2116.67 ; v1(771,2121.5) v1@768.28,2121.5 ; 734,2087.22 v1@768.28,2121.5
NetR27_2: R27.2 U12.1 | length 305.8
  Bottom Layer w10: R27.2@1459.8,2168 1496.82,2205.02 1687.98,2205.02 U12.1@1732,2161
PA0: LEFT2.7 U1.34 | length 793
  Top Layer w10: LEFT2.7@132,865 185,918 242.29,918 272.51,948.22 272.51,948.51 669.88,1345.88 U1.34@725.63,1345.88
PA1: LEFT2.8 U1.35 | length 893.4
  Top Layer w10: LEFT2.8@232,865 232,885.1 673.09,1326.2 U1.35@725.63,1326.2 ; LEFT2.8@236.53,865 cw(c295.99,865) 253.94,907.05 ; LEFT2.8@246.53,865 cw(c330.13,865) 271.01,924.12 ; LEFT2.8@256.53,865 cw(c364.27,865) 288.09,941.19
PA2: LEFT2.9 U1.36 | length 938.6
  Top Layer w10: LEFT2.9@132,765 185,818 242.29,818 725.63,1301.34 U1.36@725.63,1306.51 ; 678.42,1254.13 ccw(c626.03,1306.51) U1.36@700.12,1306.51 ; 695.49,1271.2 ccw(c660.18,1306.51) U1.36@710.12,1306.51 ; 712.56,1288.27 ccw(c694.32,1306.51) U1.36@720.12,1306.51
PA3: LEFT2.10 U1.37 | length 758.9
  Top Layer w10: LEFT2.10@232,765 703.63,1236.63 U1.37@795.51,1236.63
PA4: DOWN.3 U1.40 | length 603.7
  Top Layer w10: DOWN.3@531,767 587,823 587,891 854.57,1158.57 U1.40@854.57,1236.63
PA5: DOWN.6 U1.41 | length 470.4
  Top Layer w10: DOWN.6@631,867 874.25,1110.25 U1.41@874.25,1236.63
PA6: DOWN.5 U1.42 | length 578.5
  Top Layer w10: DOWN.5@631,767 687,823 687,893 893.94,1099.94 U1.42@893.94,1236.63
PA7: DOWN.8 U1.43 | length 593.4
  Top Layer w10: DOWN.8@731,867 913.62,1049.62 U1.43@913.62,1236.63 ; DOWN.8@731,881.53 ccw(c731,916.6) 755.8,891.8 ccw(c780.6,867) DOWN.8@745.53,867 ; DOWN.8@731,891.53 ccw(c731,950.74) 772.87,908.87 ccw(c814.74,867) DOWN.8@755.53,867
PA8: RIGHT.6 U1.100 | length 708.1
  Top Layer w10: U1.100@1554.37,1838.01 1743.01,1838.01 ; 1746.01,1841.01 2012.51,2107.51 2046.78,2107.51 2047.29,2107 2070,2107 RIGHT.6@2130,2167
PA9: RIGHT.5 U1.101 | length 599.5
  Top Layer w10: U1.101@1554.37,1857.69 1720.69,1857.69 ; 1723.69,1860.69 RIGHT.5@2030,2167
PA10: RIGHT.4 U1.102 | length 737
  Top Layer w10: U1.102@1554.37,1877.38 1683.09,1877.38 2013.22,2207.51 2070.51,2207.51 RIGHT.4@2130,2267
PA11: ?.4 RIGHT.3 U1.103 | length 993
  Top Layer w10: v1@1499.46,1804.54 ccw(c1490.93,1813.07) 1503,1813.07 ccw(c1515.07,1813.07) v1@1506.54,1804.54 ; v1(1503,1801) 1503,1874.09 1525.97,1897.06 U1.103@1554.37,1897.06 1660.06,1897.06 RIGHT.3@2030,2267 ; 1524.12,1895.21 cw(c1528.78,1890.55) U1.103@1528.78,1897.14
  Bottom Layer w10: ?.4@1365.28,1762 1377,1762 1398,1741 1470,1741 1503,1774 v1(1503,1801) ; v1@1499.46,1797.46 cw(c1490.93,1788.93) 1503,1788.93 cw(c1515.07,1788.93) v1@1506.54,1797.46
PA12: ?.1 RIGHT.2 U1.104 | length 1010.3
  Top Layer w10: v1(1476,1918) 1478,1918 1479.25,1916.75 U1.104@1554.37,1916.75 1622.46,1916.75 2018.71,2313 2076,2313 RIGHT.2@2130,2367 ; v1@1479.54,1921.54 ccw(c1491.09,1933.09) 1491.09,1916.75
  Bottom Layer w10: ?.1@1365.28,1912 1397,1912 ; ?.1@1387.15,1907.52 cw(c1397,1898.92) 1397,1912 ; ?.1@1387.15,1916.48 ccw(c1397,1925.08) 1397,1912 ; v1@1472.46,1914.46 ccw(c1463.93,1905.93) 1463.93,1918 ccw(c1463.93,1930.07) v1@1472.46,1921.54 ; v1@1478,1918 1403,1918 1397,1912
PA13: J1.7 R2.3 RIGHT.1 SWD1.2 U1.105 | length 1985.8
  Top Layer w10: U1.105@1554.37,1936.43 1599.43,1936.43 RIGHT.1@2030,2367 ; SWD1.2@2261,2509 2389,2381 2389,1862 J1.7@2340,1813
  Bottom Layer w10: RIGHT.1@2030,2367 2105,2442 2194,2442 SWD1.2@2261,2509 ; R2.3@2256.61,1759.27 2286.27,1759.27 J1.7@2340,1813 ; R2.3@2266.58,1755.73 cw(c2275.11,1747.2) 2275.11,1759.27 cw(c2275.11,1771.34) R2.3@2266.58,1762.8 ; J1.7@2315.47,1813 cw(c2256.26,1813) 2298.13,1771.13 cw(c2340,1729.26) J1.7@2340,1788.47 ; J1.7@2325.47,1813 cw(c2290.4,1813) 2315.2,1788.2 cw(c2340,1763.4) J1.7@2340,1798.47
PA14: J1.9 P?.29 R2.1 SWD1.3 U1.109 | length 1948.9
  Top Layer w10: U1.109@1484.49,2065.37 1484.49,2106.49 1830,2452 P?.29@1830,2467 1946,2583 2087,2583 SWD1.3@2161,2509 2235,2435 2235,1827 2340,1722 J1.9@2340,1713
  Bottom Layer w10: R2.1@2256.61,1725.8 2297.2,1725.8 2310,1713 ; R2.1@2266.58,1722.27 cw(c2275.11,1713.73) 2275.11,1725.8 cw(c2275.11,1737.87) R2.1@2266.58,1729.34 ; J1.9@2315.96,1708.13 ccw(c2310,1706.92) 2310,1713 ; J1.9@2315.96,1717.87 cw(c2310,1719.08) 2310,1713 ; J1.9@2340,1713 2310,1713
PA15: J1.5 P?.30 R2.5 U1.110 | length 2089.3
  Top Layer w10: U1.110@1464.8,2065.37 1464.8,2130.8 1777,2443 1777,2503 1830,2556 P?.30@1830,2567 1877,2614 2143,2614 2214,2543 2214,2486 2250.98,2449.02 2250.98,2021.02 2340,1932 J1.5@2340,1913
  Bottom Layer w10: R2.5@2256.61,1792.73 2265.11,1792.73 2296,1823.62 2296,1869 J1.5@2340,1913 ; R2.5@2263.04,1797.73 ccw(c2263.04,1814.8) 2275.11,1802.73 ; J1.5@2315.47,1913 cw(c2256.26,1913) 2298.13,1871.13 cw(c2340,1829.26) J1.5@2340,1888.47 ; J1.5@2325.47,1913 cw(c2290.4,1913) 2315.2,1888.2 cw(c2340,1863.4) J1.5@2340,1898.47
PB0: DOWN.9 U1.46 | length 528.3
  Top Layer w10: DOWN.9@831,767 886,822 886,882 972.68,968.68 U1.46@972.68,1236.63
PB1: DOWN.12 U1.47 | length 396.1
  Top Layer w10: DOWN.12@931,867 931,869.61 992.36,930.97 992.36,1153.01 991.06,1154.31 991.06,1235.33 U1.47@992.36,1236.63
PB3: J1.13 P?.10 R1.1 U1.133 | length 3296.6
  Top Layer w10: P?.10@830,2567 882,2515 882,2457.71 1012.05,2327.66 U1.133@1012.05,2065.37
  Bottom Layer w10: P?.10@830,2567 882,2515 882,2457.71 1010,2329.71 1992.7,2329.71 1995.92,2326.49 2205.25,2326.49 2380.51,2151.23 2380.51,1696.22 2337.8,1653.51 2323.22,1653.51 2299.49,1629.78 2299.49,1596.22 2340,1555.71 J1.13@2340,1513 2274,1579 R1.1@2274,1653 ; R1.1@2271.53,1646.82 cw(c2255.02,1605.53) 2299.49,1605.53 ; R1.1@2275.24,1656.11 cw(c2260.92,1620.3) 2299.49,1620.3